# Altium PCB CustomBoard.PcbDoc
Units mm, origin at the board's own origin, x right, y up, seen from the top; angles counter-clockwise.
Board outline 85.88 x 92.05 mm, 2 copper layers (Top Layer, Bottom Layer); 31 components, 41 nets, 140 pads, 0 vias.
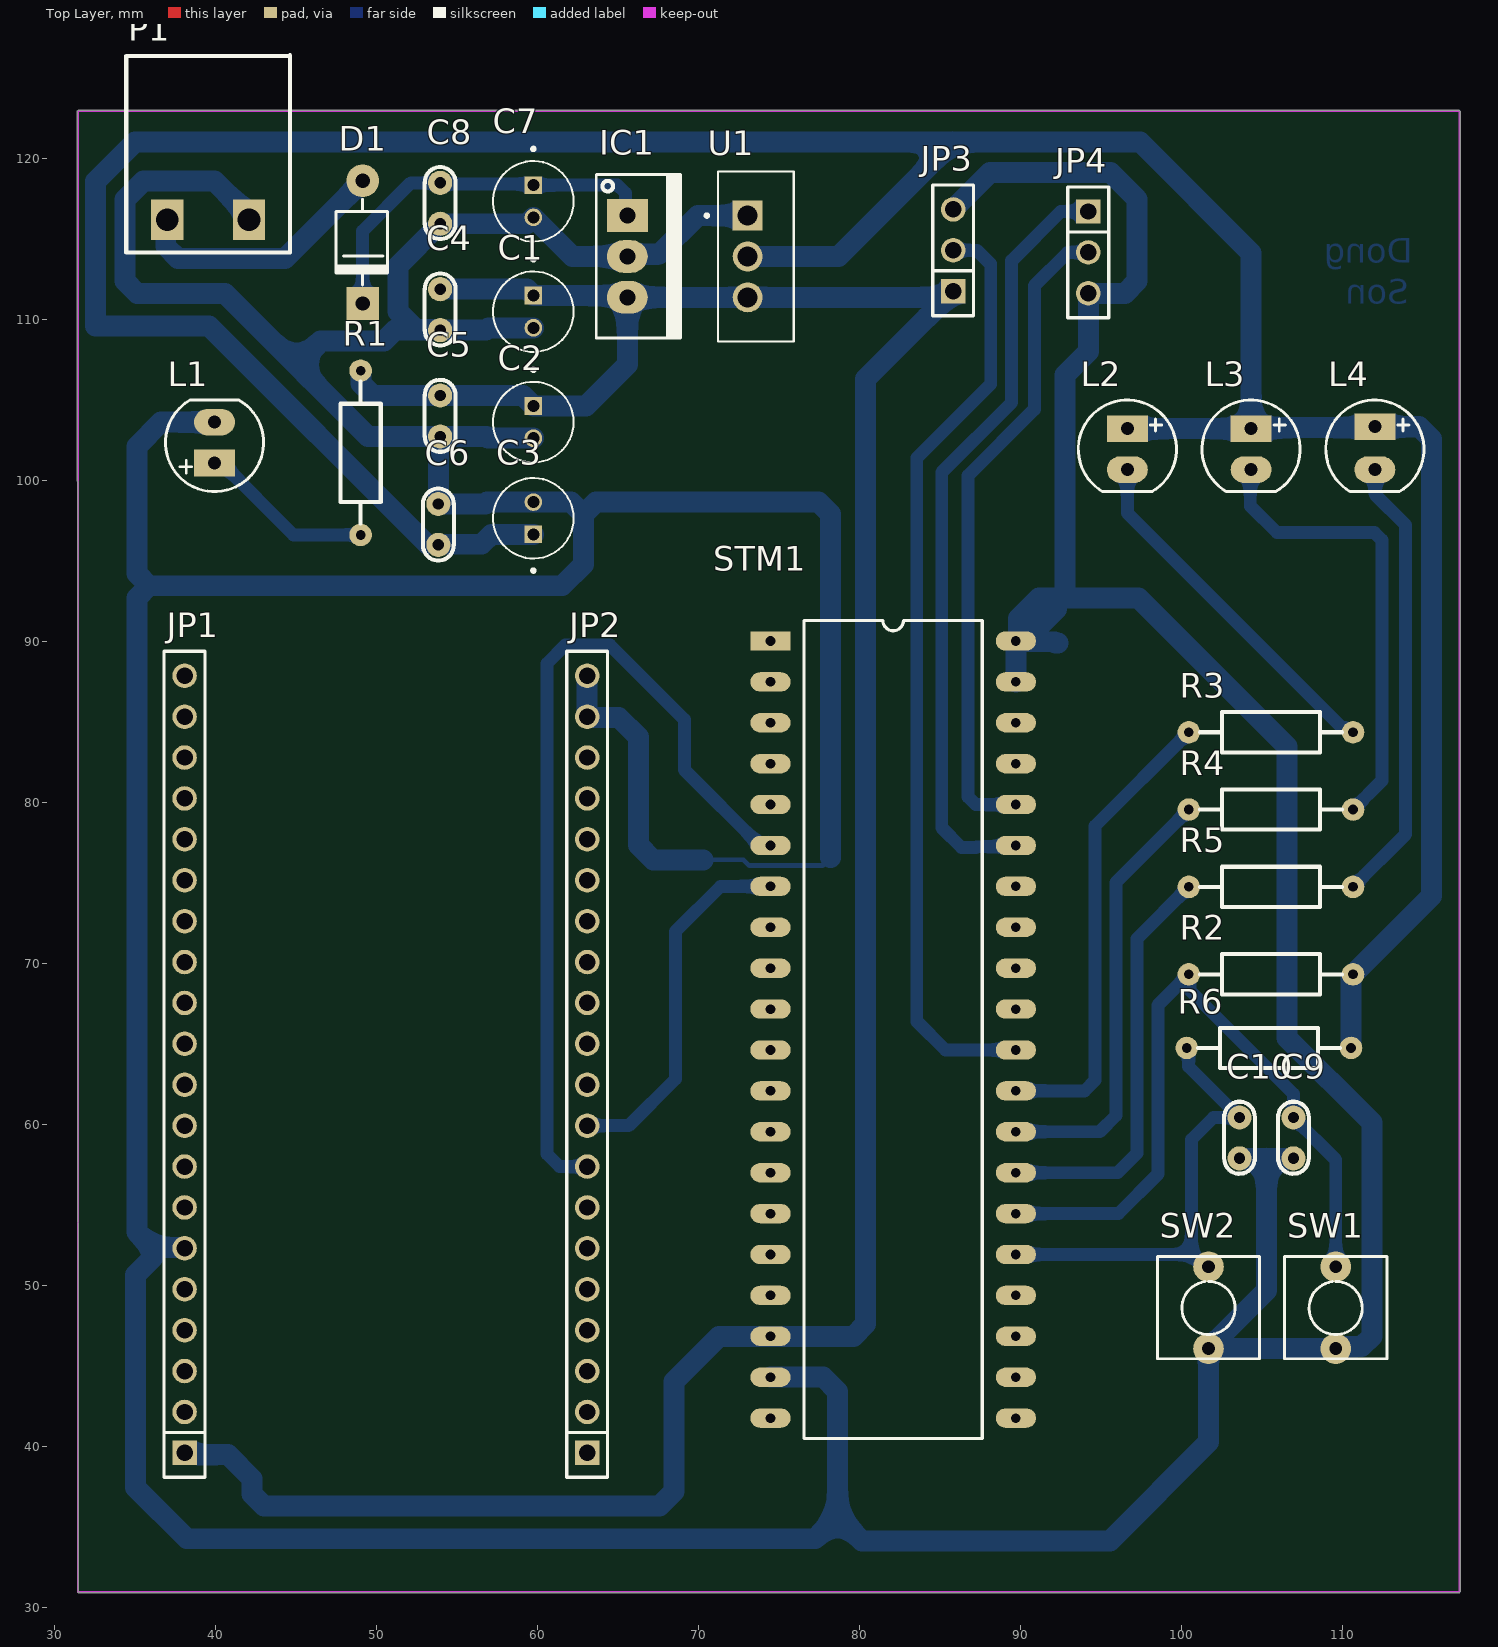
[diagram p0: Top Layer view]
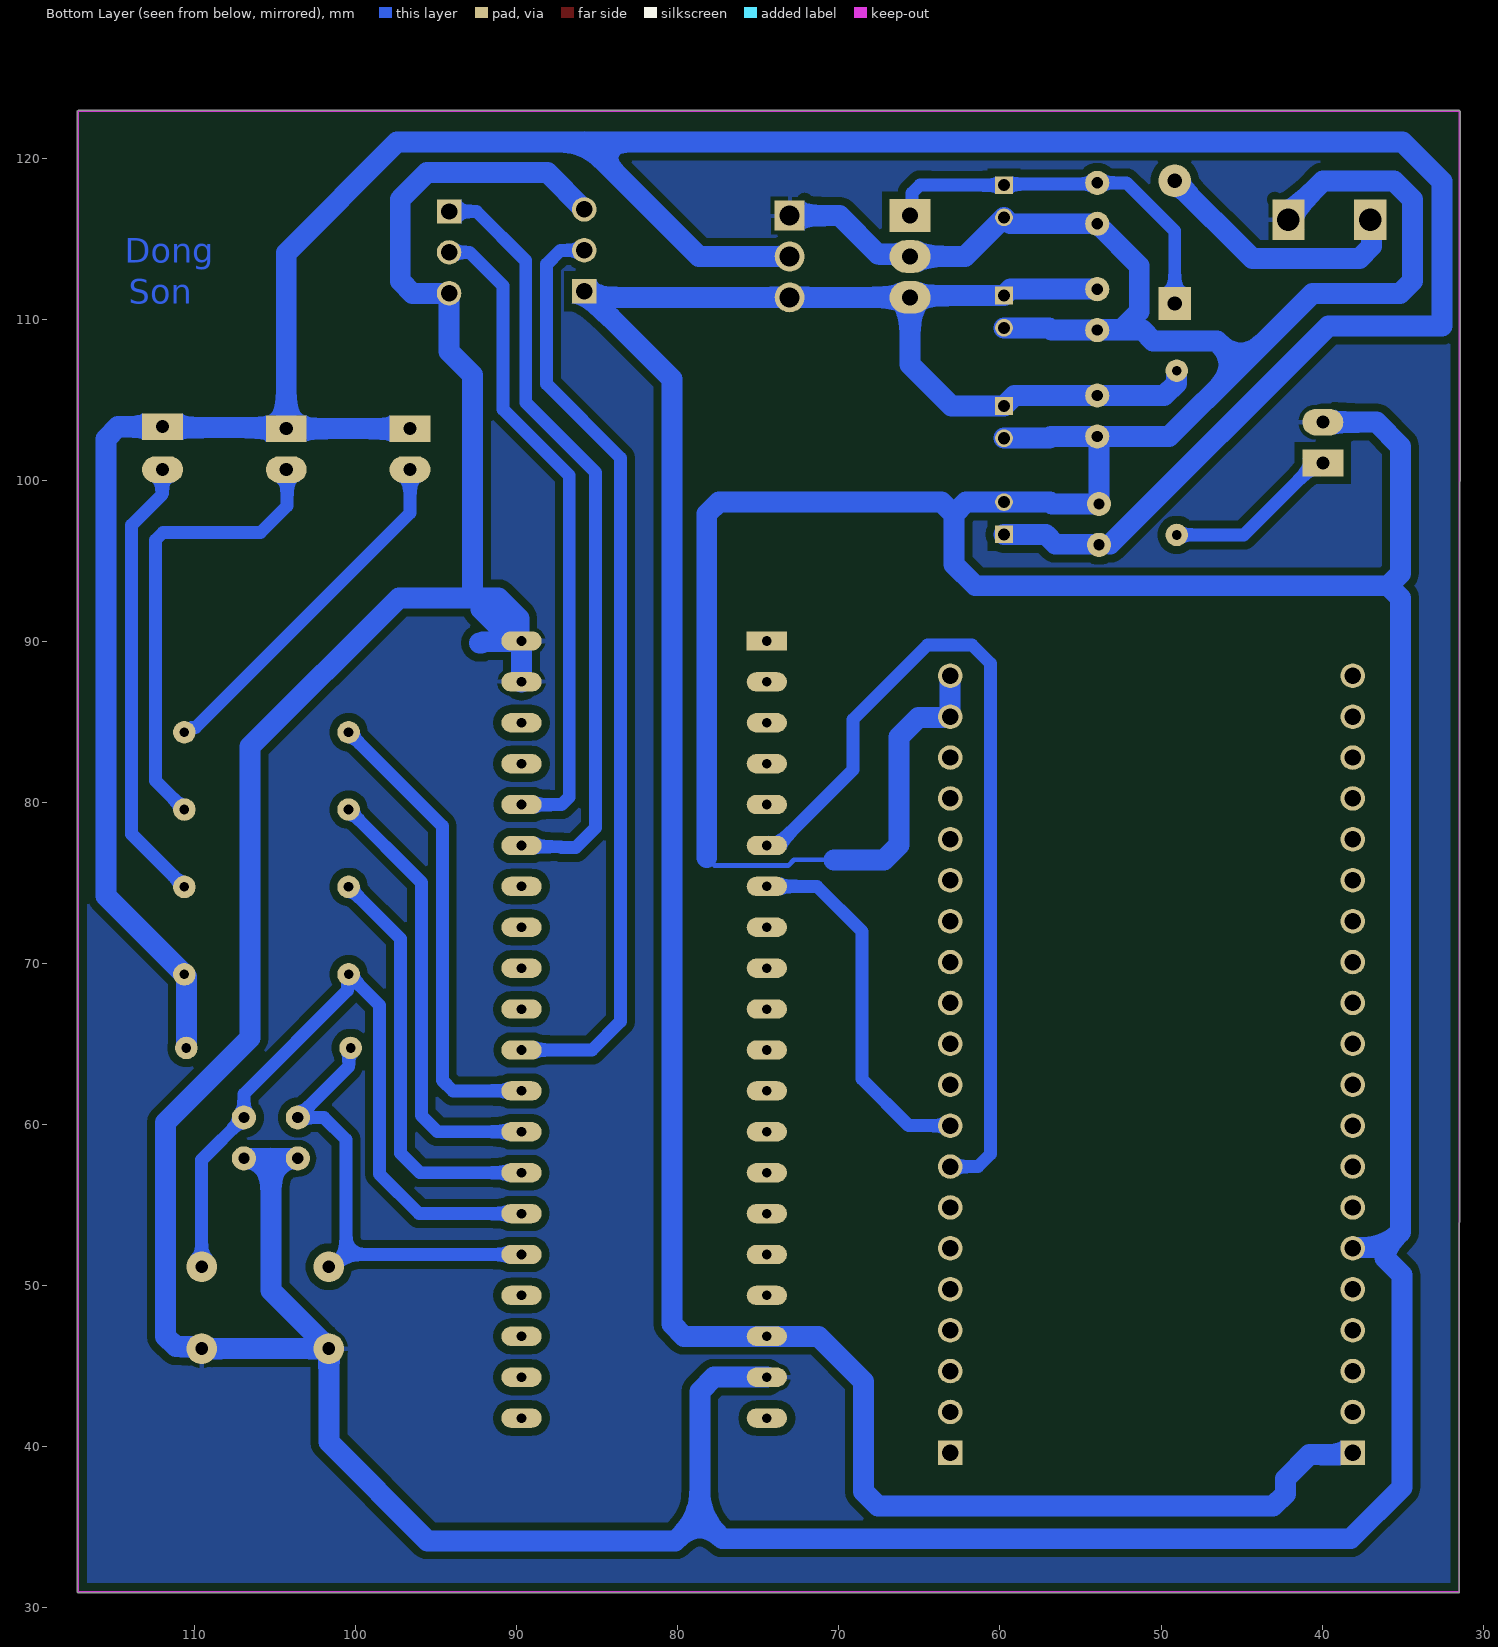
[diagram p1: Bottom Layer view, seen from below]

## Layer stack, top to bottom
Top Solder: solder mask 0.0102, Solder Resist, Dk 3.5
Top Layer: signal copper 0.0356
Dielectric 1: dielectric 0.32, FR-4, Dk 4.8
Bottom Layer: signal copper 0.0356
Bottom Solder: solder mask 0.0102, Solder Resist, Dk 3.5

## Board outline
31.475,30.938 117.25,30.938 117.3,30.988 117.3,122.936 117.25,122.986 31.475,122.986 31.425,122.936

## Design rules (kind name [scope] priority, off if disabled: settings)
Clearance [All] p1: gap=0.5 ignorepadtopadclearanceinfootprint=FALSE
PolygonConnect [InNet('GND')] p1: connectstyle=Relief reliefconductorwidth=0.254 reliefentries=4 polygonreliefangle="90 Angle" airgapwidth=0.254
RoutingVias [All] p1: holewidth=0.711 width=1.27 viastyle="Through Hole" minholewidth=0.711 minwidth=1.27 maxholewidth=0.711 maxwidth=1.27
SolderMaskExpansion [All] p1: expansion=0.102 istentingtop=FALSE
Width 3.3V [InNet('3.3V')] p1: maxlimit=2 minlimit=1 preferedwidth=1.3
Width Vin [InNet('Vin')] p2: maxlimit=2 minlimit=1 preferedwidth=1.3
Width GND [InNet('GND')] p3: maxlimit=2 minlimit=0.3 preferedwidth=1.3
Width 5V [InNet('5V')] p4: maxlimit=2 minlimit=1 preferedwidth=1.3
Width [All] p5: maxlimit=1 minlimit=0.3 preferedwidth=0.8
30 further rules are at their usual default settings.

## Components (designator, comment, footprint, x,y, rotation, side; value= is the part's Value field where it differs from the comment)
C1 "ECEA1EN100U" CAPPRD200W50D500H1100 59.75,110.491 r270 top
C2 "ECEA1EN100U" CAPPRD200W50D500H1100 59.75,103.634 r270 top
C3 "ECEA1EN100U" CAPPRD200W50D500H1100 59.75,97.663 r90 top
C4 "104" "tu gom" 53.96,110.617 r270 top
C5 "104" "tu gom" 53.96,104.013 r270 top
C6 "104" "tu gom" 53.85,97.282 r90 top
C7 "ECEA1EN100U" CAPPRD200W50D500H1100 59.75,117.348 r270 top
C8 "104" "tu gom" 53.96,117.221 r270 top
C9 "104" "tu gom" 106.95,59.182 r270 top
C10 "104" "tu gom" 103.6,59.182 r270 top
D1 "100v" "DIODE 1A" 49.149,119.888 r90 top
IC1 "LM7805" QTO-220 65.585,116.459 r270 top
JP1 "JP 1x20 2.54" "JP 1x20 CT" 38.09,39.624 r90 top
JP2 "JP 1x20 2.54" "JP 1x20 CT" 63.09,39.624 r90 top
JP3 "JP 1x3 2.54" "JP 1x3 CT" 85.82,111.76 r90 top
JP4 "JP 1x3 2.54" "JP 1x3 CT" 94.21,116.713 r270 top
L1 "LED 5mm" LED-5MM-RED 39.95,101.092 r90 top
L2 "LED 5mm" LED-5MM-RED 96.636,103.226 r270 top
L3 "LED 5mm" LED-5MM-Yellow 104.319,103.226 r270 top
L4 "LED 5mm" LED-5MM-Green 112.003,103.226 r270 top
P1 "CON 2 EDG5.08" "CON 2 2EDG5.08" 37.01,116.205 r0 top
R1 "1k" "tro vach 1/4w" 49.022,101.727 r90 top
R2 "10k" "tro vach 1/4w" 105.55,69.342 r0 top
R3 "1k" "tro vach 1/4w" 105.551,84.373 r0 top
R4 "1k" "tro vach 1/4w" 105.551,79.573 r0 top
R5 "1k" "tro vach 1/4w" 105.551,74.773 r0 top
R6 "10k" "tro vach 1/4w" 105.425,64.77 r0 top
STM1 "KIT STM32F103C8T6" "STM32F103 KIT" 74.475,90.043 r0 top
SW1 "SW" SW2 109.575,46.101 r90 top value="SW chip 2 pin"
SW2 "SW" SW2 101.675,46.101 r90 top value="SW chip 2 pin"
U1 "LM1117T-ADJ" TO254P1054X470X1955-3 73.06,113.919 r270 top

## Footprints (in the part's own frame and the unit in brackets; to place one, negate y for a bottom-side part, rotate by r counter-clockwise, add the part's x,y. Pads: shape width x height; smd on the part's side, far side on the other; paste and mask are expansions set on the pad)
CAPPRD200W50D500H1100 [mm]
  round 1.1 hole 0.75: N(1,0)
  rect 1.1x1.1 / inner round 1.1 / far side rect 1.1x1.1 hole 0.75: P(-1,0)
  silkscreen extent -3.35,-2.5 2.5,2.5, body extent -2.5,-2.5 2.5,2.5, height 11
"CON 2 2EDG5.08" [mm]
  rect 2x2.5 hole 1.4: 1(0,0) 2(5.08,0)
  silkscreen extent -2.54,-2.03 7.62,10.21, body extent -2.5,-1.75 7.58,10.25, height 3.15
"DIODE 1A" [mil] "Diode 1A"
  round 80 hole 35: 1(-50,0)
  rect 80x80 hole 35: 2(-350,0)
  silkscreen extent -305,-61 -95,65, body extent -366,-61 -34,65, height 122
"JP 1x3 CT" [mm]
  rect 1.52x1.52 hole 1.02: 1(0,0)
  round 1.52 hole 1.02: 2(2.54,0) 3(5.08,0)
  silkscreen extent -1.52,-1.27 6.6,1.27, body extent -1.52,-1.25 6.6,1.25, height 8.51
"JP 1x20 CT" [mm] "20 row, straight, gold plating"
  rect 1.52x1.52 hole 1.02: 1(0,0)
  round 1.52 hole 1.02: 2(2.54,0) 3(5.08,0) 4(7.62,0) 5(10.16,0) 6(12.7,0) 7(15.24,0) 8(17.78,0) 9(20.32,0) 10(22.86,0) 11(25.4,0) 12(27.94,0) 13(30.48,0) 14(33.02,0) 15(35.56,0) 16(38.1,0) 17(40.64,0) 18(43.18,0) 19(45.72,0) 20(48.26,0)
  silkscreen extent -1.52,-1.27 49.78,1.27, body extent -1.52,-1.25 49.78,1.25, height 8.51
LED-5MM-Green [mil] "LED 2 PIN, 5 ly , Only colour,pin to pin 100mil"
  rect 65x100 hole 32: 1(-5,0)
  oval 65x100 hole 32: 2(100,0)
  silkscreen extent -70,-120 154,120, body extent -69,-120 145,117, height 339
LED-5MM-RED [mil] "LED 2 PIN, 5 ly , Only colour,pin to pin 100mil"
  rect 65x100 hole 32: 1(0,0)
  oval 65x100 hole 32: 2(100,0)
  silkscreen extent -70,-120 154,120, body extent -65,-119 149,118, height 339
LED-5MM-Yellow [mil] "LED 2 PIN, 5 ly , Only colour,pin to pin 100mil"
  rect 65x100 hole 32: 1(0,0)
  oval 65x100 hole 32: 2(100,0)
  silkscreen extent -70,-120 154,120, body extent -67,-122 147,115, height 339
QTO-220 [mil] "TO-220 - 1-2-3"
  rect 80x100 hole 39: 1(0,0)
  oval 80x100 hole 39: 2(100,0) 3(200,0)
  silkscreen extent -100,-76 300,130, body extent -119,-64 322,121, height 755
"STM32F103 KIT" [mm]
  rect 2.5x1.2 hole 0.6: 1(0,0)
  oval 2.5x1.2 hole 0.6: 2(0,-2.54) 3(0,-5.08) 4(0,-7.62) 5(0,-10.16) 6(0,-12.7) 7(0,-15.24) 8(0,-17.78) 9(0,-20.32) 10(0,-22.86) 11(0,-25.4) 12(0,-27.94) 13(0,-30.48) 14(0,-33.02) 15(0,-35.56) 16(0,-38.1) 17(0,-40.64) 18(0,-43.18) 19(0,-45.72) 20(0,-48.26) 21(15.24,-48.26) 22(15.24,-45.72) 23(15.24,-43.18) 24(15.24,-40.64) 25(15.24,-38.1) 26(15.24,-35.56) 27(15.24,-33.02) 28(15.24,-30.48) 29(15.24,-27.94) 30(15.24,-25.4) 31(15.24,-22.86) 32(15.24,-20.32) 33(15.24,-17.78) 34(15.24,-15.24) 35(15.24,-12.7) 36(15.24,-10.16) 37(15.24,-7.62) 38(15.24,-5.08) 39(15.24,-2.54) 40(15.24,0)
  silkscreen extent 2.08,-49.53 13.16,1.27, body extent -3.81,-53.97 19.05,3.59, height 16.12
SW2 [mil] "SW button 2pin, 250x 250 mil"
  round 75 hole 31: 1(0,0) 2(200,0)
  silkscreen extent -25,-125 225,125
TO254P1054X470X1955-3 [mm]
  rect 1.86x1.86 / inner round 1.86 / far side rect 1.86x1.86 hole 1.24: 1(-2.54,0)
  round 1.86 hole 1.24: 2(0,0) 3(2.54,0)
  silkscreen extent -5.27,-2.64 5.27,2.86, body extent -5.08,-2.29 5.08,2.29, height 19.55
"tro vach 1/4w" [mm]
  round 1.4 hole 0.6: 1(-5.1,0) 2(5.1,0)
  silkscreen extent -4.39,-1.25 4.42,1.25, body extent -5.38,-1.2 5.38,1.2, height 2.41
"tu gom" [mm] "Tu gom mini"
  round 1.5 hole 0.7: 1(-1.27,0) 2(1.27,0)
  silkscreen extent -2.25,-0.97 2.22,0.97, body extent -2.92,-0.85 2.92,0.85, height 6.12

## Part data
C1 C2 C3 C7: "10ÂµF 25V Aluminum Electrolytic Capacitors Radial, Can 2000 Hrs @ 85Â°C", Package="RADIAL-2 Panasonic", Availability="In Stock", Check_prices=https://www.snapeda.com/parts/ECEA1EN100U/Panasonic/view-part/?ref=eda, MF=Panasonic, MP=ECEA1EN100U, Price=None, SnapEDA_Link=https://www.snapeda.com/parts/ECEA1EN100U/Panasonic/view-part/?ref=snap
C4 C5 C6 C8 C9 C10: library part "Tu gom 104 50V", "Cắm", Chung_Loai=Cắm, Don_Vi=Con, Ma_Hang=MH004761, So_Chan=2, Ten_Linh_Kien="Tụ gốm 104 100nF 50V"
D1: library part "Diode 1N4007", "Cắm", Chung_Loai=Cắm, Don_Vi=Con, Ma_Hang=MH001063, Ten_Linh_Kien="Diode 1N4007 1A (DIP)"
IC1: library part LM78xx, "On ap +, from + 5 to + 24VDC"
JP1 JP2: library part "JP 1x20 2.54 Cai Thang", "Cắm", Chung_Loai=Cắm, Don_Vi=Con, Ma_Hang=MH004006, Ten_Linh_Kien="Jump Đơn Cái 2.54MM 1x20P Thẳng"
JP3 JP4: library part "JP 1x3 2.54 Cai Thang", "Cắm", Chung_Loai=Cắm, Don_Vi=Con, Ma_Hang=MH004006, Ten_Linh_Kien="Jump Đơn Cái 2.54MM 1x20P Thẳng"
L1 L2: library part "LED 5mm Do", "Cắm", Chung_Loai=Cắm, Don_Vi=Con, Ma_Hang=MH008967, Ten_Linh_Kien="Led 5MM Phủ Đỏ (1000c)"
L3: library part "LED 5mm Vang", "Cắm", Chung_Loai=Cắm, Don_Vi=Con, Ma_Hang=MH008968, Ten_Linh_Kien="Led 5MM Phủ Vàng (1000c)"
L4: library part "LED 5mm Xanh La", "Cắm", Chung_Loai=Cắm, Don_Vi=Con, Ma_Hang=MH008969, Ten_Linh_Kien="LED 5MM Phủ Xanh (1000c)"
P1: "Cắm", Chung_Loai=Cắm, Don_Vi=Con, Ma_Hang=MH000759, Ten_Linh_Kien="CON 2 2EDG5.08-2P 5.08MM ( Xanh Cong)"
R1: library part "Tro Vach 1/4W 5% 1k", "Cắm", Chung_Loai=Cắm, Don_Vi=Con, Ma_Hang=MH007390, So_Chan=2, Ten_Linh_Kien="Trở Vạch 1/4w 5% 1k"
R2 R6: library part "Tro Vach 1/4W 1% 10k", "Cắm", Chung_Loai=Cắm, Don_Vi=Con, Ma_Hang=MH006349, So_Chan=2, Ten_Linh_Kien="Trở Vạch 1/4w 1% 10k"
R3 R4 R5: library part "Tro Vach 1/4W 1% 4.7k", "Cắm", Chung_Loai=Cắm, Don_Vi=Con, Ma_Hang=MH006350, So_Chan=2, Ten_Linh_Kien="Trở Vạch 1/4w 1% 4.7k"
STM1: library part "STM32f103 Bluepill", "KIT STM32F103C8T6 Bluepill"
SW1 SW2: library part SW2, "Switch button 2 pin"
U1: "Linear Voltage Regulator IC Positive Adjustable 1 Output 800mA TO-220-3", Package="TO-220-3 TEXAS INSTRUMENTS", Check_prices=https://www.snapeda.com/parts/LM1117T-ADJ/Texas+Instruments/view-part/?ref=eda, MF="Texas Instruments", MP=LM1117T-ADJ, SnapEDA_Link=https://www.snapeda.com/parts/LM1117T-ADJ/Texas+Instruments/view-part/?ref=snap

## Nets (pads, with @x,y where several pads share a name; then routed paths per layer and width w, separated by ;. In a path a pad name is that pad's centre, name@x,y a point inside that pad or via, vN(x,y) a via of type N, cw(c..) or ccw(c..) an arc to the next point about the centre after c; other vN are vias at no path point)
3.3V: C3.P C6.1 L2.1 L3.1 L4.1 R2.2 R6.2 U1.2 | length 202.9
  Bottom Layer w1.3: C6.1@53.159,96.05 39.608,109.601 32.56,109.601 32.56,118.589 35.002,121.031 85.807,121.031 ; C6.1 53.888,96.05 56.542,96.05 57.155,96.663 C3.P ; U1.2@72.908,113.919 U1.2 78.695,113.919 85.807,121.031 ; L2.1 L3.1 ; R6.2 110.525,69.19 110.65,69.315 R2.2 115.52,74.212 115.52,102.591 114.758,103.353 L4.1 111.939,103.289 104.383,103.289 L3.1 ; 85.807,121.031 97.436,121.031 104.319,114.148 L3.1
5V: C1.P C2.P C4.1 C5.1 IC1.3 JP1.1 JP3.1 R1.2 STM1.18 U1.3 | length 174.1
  Bottom Layer w1.3: JP1.1 38.2,39.514 40.773,39.514 42.27,38.017 42.27,37.084 43.032,36.322 67.57,36.322 68.48,37.232 68.48,44.069 71.274,46.863 STM1.18 79.618,46.863 80.38,47.625 80.38,106.32 JP3.1@85.439,111.379 ; R1.2 49.041,106.808 49.041,106.045 49.803,105.283 C5.1 59.101,105.283 C2.P 63.012,104.634 65.585,107.207 IC1.3 ; C4.1 59.354,111.887 C1.P 65.473,111.491 IC1.3 ; JP3.1 JP3.1@85.439,111.379 ; IC1.3 U1.3 JP3.1@85.439,111.379
A5: JP3.2 STM1.30 | length 58.5
  Bottom Layer w0.8: JP3.2 87.291,114.3 88.15,113.441 88.15,105.994 83.56,101.404 83.56,66.421 85.338,64.643 STM1.30
A6: STM1.31
A7: STM1.32
A8: STM1.5
A11: STM1.8
A12: STM1.9
A15: STM1.10
B0: STM1.33
B1: STM1.34
B3: STM1.11
B4: STM1.12
B5: STM1.13
B6: STM1.14
B7: STM1.15
B8: STM1.16
B9: STM1.17
B12: STM1.1
B13: STM1.2
B14: STM1.3
B15: STM1.4
BT_RUN: C10.1 R6.1 STM1.25 SW2.2 | length 28.9
  Bottom Layer w0.8: STM1.25 100.614,51.943 ; R6.1 100.44,64.655 100.44,63.612 C10.1 101.988,60.452 100.614,59.078 100.614,51.943 ; SW2.2@101.675,50.882 SW2.2 101.376,51.181 100.614,51.943
BT_STOP: C9.1 R2.1 STM1.26 SW1.2 | length 45
  Bottom Layer w0.8: STM1.26 96.081,54.483 98.53,56.932 98.53,67.422 R2.1 100.527,69.265 100.527,68.331 106.95,61.908 C9.1 109.575,57.827 SW1.2
C13: STM1.22
C14: STM1.23
C15: STM1.24
ESP_RX: JP2.8 STM1.6 | length 54.6
  Bottom Layer w0.8: JP2.8 61.37,57.404 60.59,58.184 60.59,88.646 61.733,89.789 64.5,89.789 69.124,85.165 69.124,82.044 73.825,77.343 STM1.6
ESP_TX: JP2.9 STM1.7 | length 22.9
  Bottom Layer w0.8: JP2.9 65.668,59.944 68.57,62.846 68.57,72.009 71.364,74.803 STM1.7
GND: C1.N C2.N C3.N C4.2 C5.2 C6.2 C7.N C8.2 C9.2 C10.2 IC1.2 JP1.6 JP2.19 JP2.20 JP3.3 JP4.3 L1.2 P1.2 STM1.19 STM1.39 STM1.40 SW1.1 SW2.1 U1.1 | length 499.6
  Bottom Layer w0.3: 70.3,76.454 72.791,76.454 73.152,76.093 77.722,76.093 78.21,76.581
  Bottom Layer w1.3: JP1.6 38.048,52.366 36.095,52.366 ; L1.2 36.63,103.632 35.13,102.132 35.13,94.234 35.892,93.472 ; P1.2 42.09,116.455 39.94,118.605 35.534,118.605 34.39,117.461 34.39,112.395 35.152,111.633 40.6,111.633 45.045,107.188 ; C2.N 56.937,102.634 56.827,102.743 C5.2 ; C1.N 56.954,109.491 56.81,109.347 C4.2 ; JP2.20@63.15,87.884 JP2.20 JP2.19 63.132,85.302 65.052,85.302 66.28,84.074 66.28,77.367 67.193,76.454 70.3,76.454 ; U1.1 69.961,116.459 67.561,114.059 65.725,114.059 IC1.2 62.179,113.919 C7.N 59.353,115.951 C8.2 51.35,113.341 51.35,110.49 52.455,109.385 53.922,109.385 C4.2 ; STM1.19 77.751,44.323 78.64,43.434 78.64,35.687 ; 78.21,76.581 78.21,97.917 77.448,98.679 63.638,98.679 62.86,97.901 ; JP3.3 88.106,119.126 95.589,119.126 97.24,117.475 97.24,112.395 96.478,111.633 JP4.3 94.21,108.023 92.75,106.563 92.75,92.71 ; STM1.39 STM1.40 ; 92.33,89.916 92.183,89.916 92.106,89.993 89.765,89.993 STM1.40 ; C10.2 105.275,57.912 ; C9.2 105.275,57.912 ; 35.892,93.472 61.53,93.472 62.86,94.802 62.86,97.901 ; 35.892,93.472 35.13,92.71 35.13,53.331 36.095,52.366 ; 36.095,52.366 36.095,51.728 35.04,50.673 35.04,37.48 38.23,34.29 77.243,34.29 78.64,35.687 ; 45.045,107.188 49.49,102.743 C5.2 ; 45.045,107.188 46.534,108.677 50.486,108.677 51.156,109.347 C4.2 ; C5.2 53.96,102.689 53.85,102.579 C6.2 56.772,98.552 56.883,98.663 C3.N 62.098,98.663 62.86,97.901 ; 78.64,35.687 80.164,34.163 95.55,34.163 101.675,40.288 SW2.1 ; STM1.40 STM1.40@89.83,90.043 ; STM1.40@89.83,90.043 90.265,90.043 92.241,92.019 92.241,92.71 ; STM1.40@89.83,90.043 89.88,90.093 89.88,91.44 91.15,92.71 92.241,92.71 ; 92.241,92.71 92.75,92.71 ; 92.75,92.71 97.329,92.71 106.56,83.479 106.56,65.387 111.82,60.127 111.82,46.863 111.174,46.217 109.691,46.217 SW1.1 SW2.1 ; SW2.1 105.275,49.701 105.275,57.912
LED_1: R5.1 STM1.27 | length 25.9
  Bottom Layer w0.8: STM1.27 96.02,57.023 97.23,58.233 97.23,71.552 R5.1
LED_2: R4.1 STM1.28 | length 27.5
  Bottom Layer w0.8: STM1.28 94.921,59.563 95.93,60.572 95.93,75.052 R4.1
LED_3: R3.1 STM1.29 | length 29.2
  Bottom Layer w0.8: STM1.29 93.972,62.103 94.63,62.761 94.63,78.552 R3.1
MCU_RX: JP4.2 STM1.36 | length 40.8
  Bottom Layer w0.8: STM1.36 87.219,79.883 86.75,80.352 86.75,100.315 90.86,104.425 90.86,112.103 92.93,114.173 JP4.2
MCU_TX: JP4.1 STM1.35 | length 48.2
  Bottom Layer w0.8: STM1.35 89.638,77.266 87.28,77.266 87.23,77.216 86.34,77.216 85.11,78.446 85.11,100.513 89.45,104.853 89.45,113.661 92.502,116.713 JP4.1
NetC7_P: C7.P C8.1 D1.2 IC1.1 | length 24.3
  Bottom Layer w0.8: D1.2 49.149,115.5 52.14,118.491 C8.1 54.031,118.419 59.679,118.419 C7.P 64.334,118.348 64.35,118.364 64.962,118.364 65.47,117.856 65.47,116.574 IC1.1
  Bottom Layer w1: IC1.1@65.228,116.102 IC1.1
NetL1_1: L1.1 R1.1 | length 10.9
  Bottom Layer w0.8: L1.1 40.394,101.092 44.859,96.627 R1.1
NetL2_2: L2.2 R3.2 | length 22.3
  Bottom Layer w0.8: L2.2 96.636,97.992 109.955,84.673 110.189,84.673 110.489,84.373 R3.2
NetL3_2: L3.2 R4.2 | length 28.8
  Bottom Layer w0.8: L3.2 104.27,100.636 104.27,98.425 105.921,96.774 111.971,96.774 112.44,96.305 112.44,81.362 R4.2
NetL4_2: L4.2 R5.2 | length 28.1
  Bottom Layer w0.8: R5.2 113.92,78.042 113.92,97.239 112.03,99.129 112.03,100.658 L4.2
Vin: D1.1 P1.1 | length 16.2
  Bottom Layer w1.3: P1.1 36.92,116.115 36.92,114.554 37.682,113.792 44.323,113.792 D1.1
pads on no net: JP1.2 JP1.3 JP1.4 JP1.5 JP1.7 JP1.8 JP1.9 JP1.10 JP1.11 JP1.12 JP1.13 JP1.14 JP1.15 JP1.16 JP1.17 JP1.18 JP1.19 JP1.20 JP2.1 JP2.2 JP2.3 JP2.4 JP2.5 JP2.6 JP2.7 JP2.10 JP2.11 JP2.12 JP2.13 JP2.14 JP2.15 JP2.16 JP2.17 JP2.18 STM1.20 STM1.21 STM1.37 STM1.38

## Polygon pours and split planes (outlines as drawn)
GND on Bottom Layer "GND_L02_P000" (solid, remove dead copper, pour order 0): 31.49,122.936 117.36,122.936 117.36,30.734 116.979,31.115 31.73,31.115

## Keep-outs
Keep-Out Layer:
  lines w0.1: 31.475,30.988 117.25,30.988 117.25,122.936 31.475,122.936 31.475,30.988

## Other copper
Bottom Layer:
  text "Dong" at 114.35,113.538 h1.52
  text "Son" at 114.096,110.998 h1.52